# Altium PCB PCB2.PcbDoc
Units mil, origin at the board's own origin, x right, y up, seen from the top; angles counter-clockwise.
Board outline 7210 x 4950 mil, 2 copper layers (Top Layer, Bottom Layer); 18 components, 25 nets, 105 pads, 0 vias.
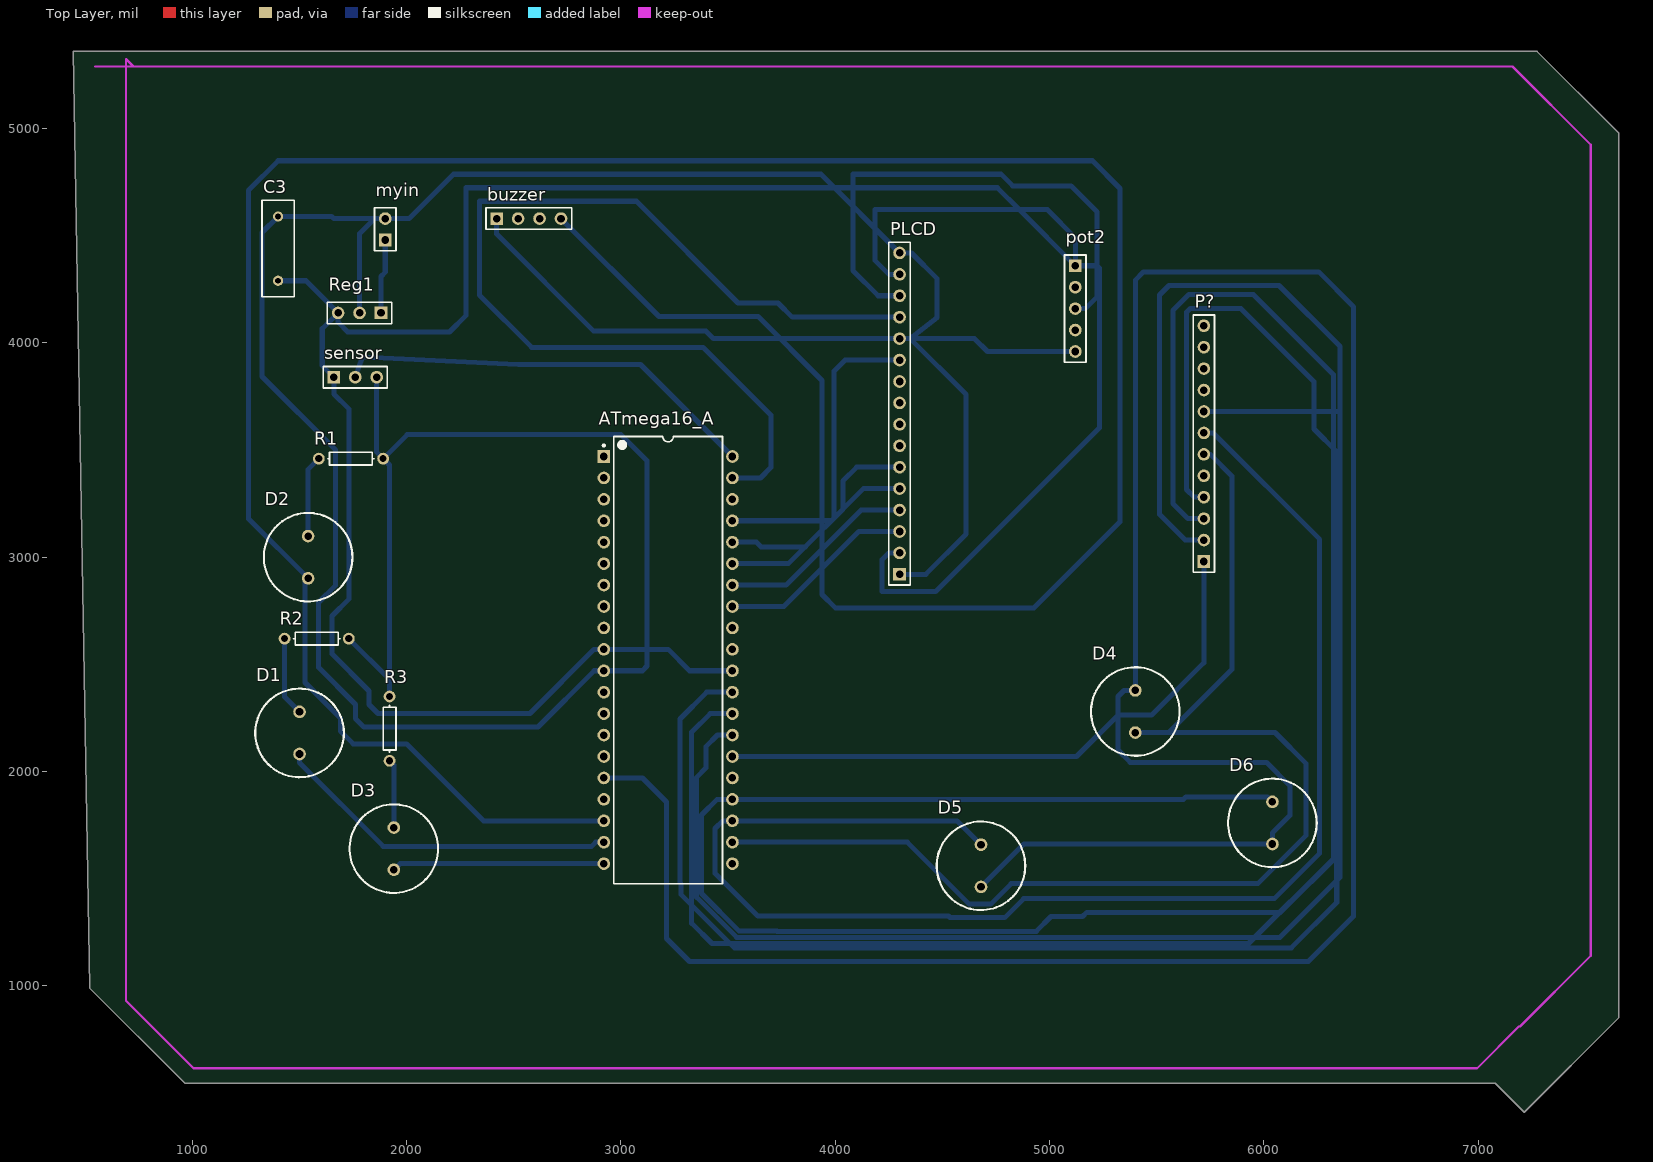
[diagram p0: Top Layer view]
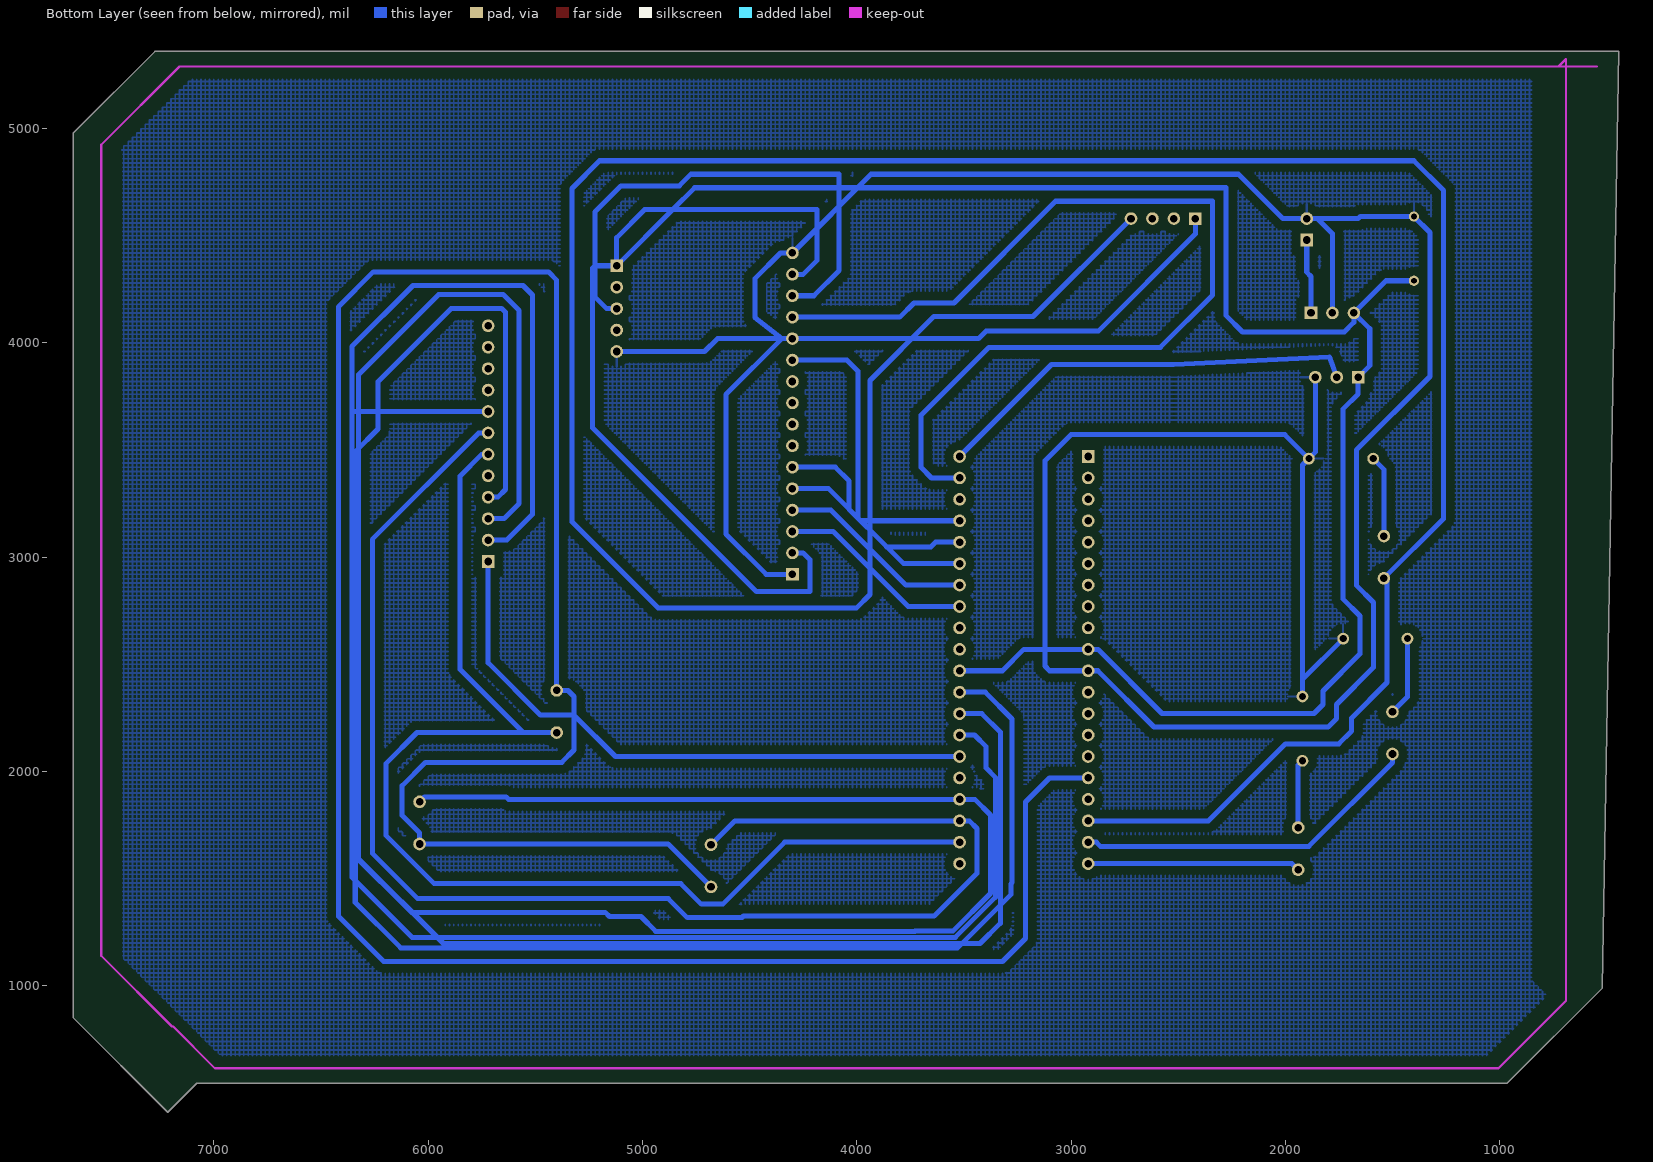
[diagram p1: Bottom Layer view, seen from below]

## Layer stack, top to bottom
Top Layer: signal copper 1.4
Dielectric: dielectric 12.6, FR-4, Dk 4.8
Bottom Layer: signal copper 1.4

## Board outline
445,5360 7275,5360 7650,4985 7655,4980 7655,855 7655,850 7215,410 7080,545 1110,545 965,545 520,990

## Design rules (kind name [scope] priority, off if disabled: settings)
Clearance [All] p1: gap=39.37
PolygonConnect [All] p1: connectstyle=Relief reliefconductorwidth=10 reliefentries=4 polygonreliefangle="90 Angle"
RoutingLayers [All] p1: top layer_v5=FALSE bottom layer_v5=TRUE
RoutingVias [All] p1: holewidth=28 width=50 viastyle="Through Hole" minholewidth=28 minwidth=50 maxholewidth=28 maxwidth=50
SilkscreenOverComponentPads [All] p1: minsilkscreentomaskgap=10
SolderMaskExpansion [All] p1: expansion=4
Width [All] p1: maxlimit=23.62 minlimit=23.62 preferedwidth=23.62 minimp=50.000000 maximp=50.000000 favimp=50.000000
26 further rules are at their usual default settings.

## Components (designator, comment, footprint, x,y, rotation, side; value= is the part's Value field where it differs from the comment)
ATmega16_A "ATmega16-16PC" 40P6 3220,2520 r0 top
buzzer "Header 4" HDR1X4 2420,4580 r0 top
C3 "Cap" RAD-0.3 1400,4440 r270 top
D1 "LED0" RB5-10.5 1500,2180 r90 top
D2 "LED0" RB5-10.5 1540,3000 r90 top
D3 "LED0" RB5-10.5 1940,1640 r90 top
D4 "LED0" RB5-10.5 5400,2280 r270 top
D5 "LED0" RB5-10.5 4680,1560 r90 top
D6 "LED0" RB5-10.5 6040,1760 r90 top
myin "Header 2" HDR1X2 1900,4480 r90 top
P? "Header 12" HDR1X12 5720,2980 r90 top
PLCD "Header 16" HDR1X16 4300,2920 r90 top
pot2 "Header 5" HDR1X5 5120,4360 r270 top
R1 "Res1" AXIAL-0.3 1740,3460 r180 top
R2 "Res1" AXIAL-0.3 1580,2620 r180 top
R3 "Res1" AXIAL-0.3 1920,2200 r270 top
Reg1 "MC7805ACT" HDR1X3 1880,4140 r180 top
sensor "Header 3" HDR1X3 1660,3840 r0 top

## Footprints (in the part's own frame and the unit in brackets; to place one, negate y for a bottom-side part, rotate by r counter-clockwise, add the part's x,y. Pads: shape width x height; smd on the part's side, far side on the other; paste and mask are expansions set on the pad)
40P6 [mm] "DIP, 40-Leads, Row Spacing 15.24mm, Pitch 2.54mm, Body 52.2x13.95mm"
  rect 1.5x1.5 hole 0.9: 1(-7.62,24.13)
  round 1.5 hole 0.9: 2(-7.62,21.59) 3(-7.62,19.05) 4(-7.62,16.51) 5(-7.62,13.97) 6(-7.62,11.43) 7(-7.62,8.89) 8(-7.62,6.35) 9(-7.62,3.81) 10(-7.62,1.27) 11(-7.62,-1.27) 12(-7.62,-3.81) 13(-7.62,-6.35) 14(-7.62,-8.89) 15(-7.62,-11.43) 16(-7.62,-13.97) 17(-7.62,-16.51) 18(-7.62,-19.05) 19(-7.62,-21.59) 20(-7.62,-24.13) 21(7.62,-24.13) 22(7.62,-21.59) 23(7.62,-19.05) 24(7.62,-16.51) 25(7.62,-13.97) 26(7.62,-11.43) 27(7.62,-8.89) 28(7.62,-6.35) 29(7.62,-3.81) 30(7.62,-1.27) 31(7.62,1.27) 32(7.62,3.81) 33(7.62,6.35) 34(7.62,8.89) 35(7.62,11.43) 36(7.62,13.97) 37(7.62,16.51) 38(7.62,19.05) 39(7.62,21.59) 40(7.62,24.13)
  silkscreen extent -7.74,-26.5 6.45,26.5, body extent -7.05,-26.47 7.05,26.47, height 4.83
AXIAL-0.3 [mm] "Axial Device, Thru-Hole; 2 Leads; 0.3 in Pin Spacing"
  round 1.4 hole 0.85: 1(-3.81,0) 2(3.81,0)
  silkscreen extent -2.77,-0.76 2.77,0.76
HDR1X2 [mm] "Connector; Header; 2 Position"
  rect 1.5x1.5 hole 0.9: 1(0,0)
  round 1.5 hole 0.9: 2(2.54,0)
  silkscreen extent -1.27,-1.27 3.81,1.27
HDR1X3 [mm] "Connector; Header; 3 Position"
  rect 1.5x1.5 hole 0.9: 1(0,0)
  round 1.5 hole 0.9: 2(2.54,0) 3(5.08,0)
  silkscreen extent -1.27,-1.27 6.35,1.27
HDR1X4 [mm] "Connector; Header; 4 Position"
  rect 1.5x1.5 hole 0.9: 1(0,0)
  round 1.5 hole 0.9: 2(2.54,0) 3(5.08,0) 4(7.62,0)
  silkscreen extent -1.27,-1.27 8.89,1.27
HDR1X5 [mm] "Connector; Header; 5 Position"
  rect 1.5x1.5 hole 0.9: 1(0,0)
  round 1.5 hole 0.9: 2(2.54,0) 3(5.08,0) 4(7.62,0) 5(10.16,0)
  silkscreen extent -1.27,-1.27 11.43,1.27
HDR1X12 [mm] "Connector; Header; 12 Position"
  rect 1.5x1.5 hole 0.9: 1(0,0)
  round 1.5 hole 0.9: 2(2.54,0) 3(5.08,0) 4(7.62,0) 5(10.16,0) 6(12.7,0) 7(15.24,0) 8(17.78,0) 9(20.32,0) 10(22.86,0) 11(25.4,0) 12(27.94,0)
  silkscreen extent -1.27,-1.27 29.21,1.27
HDR1X16 [mm] "Connector; Header; 16 Position"
  rect 1.5x1.5 hole 0.9: 1(0,0)
  round 1.5 hole 0.9: 2(2.54,0) 3(5.08,0) 4(7.62,0) 5(10.16,0) 6(12.7,0) 7(15.24,0) 8(17.78,0) 9(20.32,0) 10(22.86,0) 11(25.4,0) 12(27.94,0) 13(30.48,0) 14(33.02,0) 15(35.56,0) 16(38.1,0)
  silkscreen extent -1.27,-1.27 39.37,1.27
RAD-0.3 [mm] "Radial Cap, Thru-Hole; 2 Leads; 0.3 in Pin Spacing"
  round 1.2 hole 0.7: 1(-3.81,0) 2(3.81,0)
  silkscreen extent -5.71,-1.91 5.71,1.91
RB5-10.5 [mm] "Motor, General Kind; 2 Leads"
  round 1.5 hole 0.9: 1(-2.5,0) 2(2.5,0)
  silkscreen extent -5.25,-5.25 5.25,5.25

## Part data
ATmega16_A: "8-Bit AVR Microcontroller with 16K Bytes of In-System Programmable Flash Memory"
buzzer: "Header, 4-Pin"
C3: "Capacitor"
D1 D2 D3 D4 D5 D6: "Typical INFRARED GaAs LED"
myin: "Header, 2-Pin"
P?: "Header, 12-Pin"
PLCD: "Header, 16-Pin"
pot2: "Header, 5-Pin"
R1 R2 R3: "Resistor"
Reg1: "3-Terminal Positive Fixed Voltage Regulator"
sensor: "Header, 3-Pin"

## Nets (pads, with @x,y where several pads share a name; then routed paths per layer and width w, separated by ;. In a path a pad name is that pad's centre, name@x,y a point inside that pad or via, vN(x,y) a via of type N, cw(c..) or ccw(c..) an arc to the next point about the centre after c; other vN are vias at no path point)
C1: ATmega16_A.22 D4.2 P?.6 | length 5771.1
  Bottom Layer w23.62: ATmega16_A.22 4335.86,1670 4625,1380.86 4725,1380.86 4820.66,1476.53 5971.53,1476.53 6197.52,1702.52 6197.52,2036.11 6052.05,2181.57 5556.3,2181.57 ; P?.6 5750,3480 5851.72,3378.28 5851.72,2476.99 5556.3,2181.57 ; 5556.3,2181.57 D4.2 5556.3,2181.57
C2: ATmega16_A.23 D5.2 P?.7 | length 6754
  Bottom Layer w23.62: D5.2 4568.43,1770 ATmega16_A.23 3475,1770 3439,1734 3439,1525 3638.57,1325.43 4528.02,1325.43 4535.57,1317.87 4790.52,1317.87 4879.11,1406.47 6048.52,1406.47 6260.51,1618.45 6260.51,3083.21 5763.72,3580 P?.7
C3: ATmega16_A.24 D6.2 P?.8 | length 8972.9
  Bottom Layer w23.62: P?.8 6355,3680 6355,1619.86 6078.14,1343 5174,1343 5154,1323 5007,1323 4938,1254 3729,1254 3728,1255 3552,1255 3376,1431 3376,1797 3449,1870 ATmega16_A.24 5625.4,1870 5636.1,1880.7 6017.72,1880.7 D6.2
MG: ATmega16_A.11 buzzer.1 C3.1 myin.2 PLCD.1 PLCD.12 PLCD.16 pot2.5 R1.1 R2.1 R3.1 Reg1.2 sensor.3 | length 16900.5
  Bottom Layer w23.62: R2.1 1920,2430 ; Reg1.2 1780,4510 1850,4580 ; sensor.3 1860,3490 R1.1 ; buzzer.1 2420,4508 2873,4055 3397,4055 3432,4020 PLCD.12 4350,4020 ; PLCD.1 4422.52,2920 4610,3107.48 4610,3760 4350,4020 ; pot2.5 4710,3960 4650,4020 4350,4020 ; 1850,4580 myin.2 ; 1850,4580 1660,4580 1650,4590 C3.1 1325,4515 1325,3843.74 1668.74,3500 1668.74,2869.03 1588,2788.29 1588,2486.14 1761.42,2312.72 1761.42,2246.58 1800,2208 2613,2208 2875,2470 ATmega16_A.11 3100,2470 3121.82,2491.82 3121.82,3450.18 3000,3572 2002,3572 R1.1 ; 1850,4580 myin.2 ; R1.1 1920,3430 1920,2430 ; myin.2 2011,4580 2218,4787 3933,4787 PLCD.16 4355.2,4420 4475.51,4299.69 4475.51,4118.41 4350,4020 ; 1920,2430 R3.1 1920,2430
MP: ATmega16_A.10 ATmega16_A.30 C3.2 PLCD.2 PLCD.15 pot2.1 Reg1.3 sensor.1 | length 12451.4
  Bottom Layer w23.62: C3.2 1530,4290 Reg1.3 ; ATmega16_A.30 3320,2470 3220,2570 ATmega16_A.10 2874,2570 2575,2271 1866.58,2271 1824.42,2313.15 1824.42,2375.71 1651,2549.13 1651,2725.17 1731.73,2805.9 1731.73,3690.27 1660,3762 sensor.1 1606,3894 1606,4066 Reg1.3 ; PLCD.2 4250,3020 4219,2989 4219,2839 4468,2839 5232,3603 5232,4350 5222,4360 pot2.1 ; PLCD.15 4250,4320 4186,4384 4186,4622 4858,4622 ; Reg1.3 1680,4096 1725,4051 2200,4051 2276,4127 2276,4724 4756,4724 4858,4622 ; 4858,4622 pot2.1 ; 4858,4622 4989,4622 5120,4491 pot2.1
MYINT0: ATmega16_A.16 D4.1 D5.1 D6.1 | length 13136.6
  Bottom Layer w23.62: ATmega16_A.16 3100,1970 3212.01,1857.99 3212.01,1221.08 3319.7,1113.39 6207.38,1113.39 6418.49,1324.5 6418.49,4168.51 6255.54,4331.46 5438.79,4331.46 5400,4292.67 D4.1 5347.43,2378.43 5319,2350 5319,2100 5376,2043 6012.09,2043 6121,1934.09 6121,1795.02 6040,1714.02 D6.1 4880,1661.57 D5.1
NetATmega16_A_18: ATmega16_A.18 buzzer.4 D2.1 | length 13962.8
  Bottom Layer w23.62: buzzer.4 3177,4123 3640,4123 3938,3825 3938,2825.69 4000,2763.69 4927.69,2763.69 5329,3165 5329,4721 5200,4850 1400,4850 1262,4712 1262,3179.57 D2.1 1525,2886.57 1525,2415 1691,2249 1691,2188 1750,2129 1999,2129 2358,1770 ATmega16_A.18
NetATmega16_A_19: ATmega16_A.19 D1.1 | length 1630
  Bottom Layer w23.62: D1.1 1500,2041 1890,1651 2863,1651 2882,1670 ATmega16_A.19
NetATmega16_A_20: ATmega16_A.20 D3.1 | length 991.8
  Bottom Layer w23.62: D3.1 1968.43,1570 ATmega16_A.20
NetATmega16_A_40: ATmega16_A.40 sensor.2 | length 2004.4
  Bottom Layer w23.62: sensor.2 1794,3934 2520.72,3898.71 3091.29,3898.71 ATmega16_A.40
NetD1_2: D1.2 R2.2 | length 370.6
  Bottom Layer w23.62: R2.2 1430,2348.43 D1.2
NetD2_2: D2.2 R1.2 | length 382.3
  Bottom Layer w23.62: D2.2 1540,3410 R1.2
NetD3_2: D3.2 R3.2 | length 319.9
  Bottom Layer w23.62: R3.2 1940,2030 D3.2
Netmyin_1: myin.1 Reg1.1 | length 348.3
  Bottom Layer w23.62: Reg1.1 1880,4310 1900,4330 myin.1
P1: ATmega16_A.33 PLCD.3 | length 925
  Bottom Layer w23.62: ATmega16_A.33 3760,2770 4110,3120 PLCD.3
P2: ATmega16_A.34 PLCD.4 | length 925
  Bottom Layer w23.62: ATmega16_A.34 3770.91,2870 4120.91,3220 PLCD.4
P3: ATmega16_A.35 PLCD.5 | length 925
  Bottom Layer w23.62: ATmega16_A.35 3781,2970 4131,3320 PLCD.5
P4: ATmega16_A.36 PLCD.6 | length 1020
  Bottom Layer w23.62: ATmega16_A.36 3632,3070 3653.5,3048.5 3860.33,3048.5 4036.21,3224.38 4036.21,3356.21 4100,3420 PLCD.6
P5: ATmega16_A.37 PLCD.11 | length 1492.4
  Bottom Layer w23.62: ATmega16_A.37 3981.83,3170 3994,3182.17 3994,3868 4046,3920 PLCD.11
P6: ATmega16_A.39 PLCD.13 | length 4659.3
  Bottom Layer w23.62: ATmega16_A.39 3650.83,3370 3700,3419.17 3700,3662.36 3382.94,3979.42 2583.58,3979.42 2339,4224 2339,4661 3072.1,4661 3546.42,4186.68 3733,4186.68 3799.68,4120 PLCD.13
P7: PLCD.14 pot2.3 | length 2449.6
  Bottom Layer w23.62: PLCD.14 4200,4220 4082,4338 4082,4787 4774,4787 4828,4733 5100,4733 5222,4611 5222,4215 5167,4160 pot2.3
R1: ATmega16_A.26 P?.1 | length 2854
  Bottom Layer w23.62: ATmega16_A.26 5126,2070 5319,2263 5476,2263 5720,2507 P?.1
R2: ATmega16_A.27 P?.2 | length 8799.2
  Bottom Layer w23.62: ATmega16_A.27 3450,2170 3396,2116 3396,2016 3353,1973 3353,1413 3540,1226 6075,1226 6355,1506 6355,3984 6071,4268 5557,4268 5513,4224 5513,3200 5633,3080 P?.2
R3: ATmega16_A.28 P?.3 | length 8583.2
  Bottom Layer w23.62: ATmega16_A.28 3416,2270 3330,2184 3330,1292 3425,1197 5928.14,1197 6324,1592.86 6324,3853 5951,4226 5650,4226 5576,4152 5576,3250 5646,3180 P?.3
R4: ATmega16_A.29 P?.4 | length 8509.7
  Bottom Layer w23.62: ATmega16_A.29 3400,2370 3275,2245 3275,1481 3281,1475 3281,1425 3529,1177 6128,1177 6340,1389 6340,3492 6234,3598 6234,3819 5892,4161 5657,4161 5639,4143 5639,3316 5675,3280 P?.4
pads on no net: ATmega16_A.1 ATmega16_A.2 ATmega16_A.3 ATmega16_A.4 ATmega16_A.5 ATmega16_A.6 ATmega16_A.7 ATmega16_A.8 ATmega16_A.9 ATmega16_A.12 ATmega16_A.13 ATmega16_A.14 ATmega16_A.15 ATmega16_A.17 ATmega16_A.21 ATmega16_A.25 ATmega16_A.31 ATmega16_A.32 ATmega16_A.38 buzzer.2 buzzer.3 P?.5 P?.9 P?.10 P?.11 P?.12 PLCD.7 PLCD.8 PLCD.9 PLCD.10 pot2.2 pot2.4

## Polygon pours and split planes (outlines as drawn)
MG on Bottom Layer "Keep-Out Layer-No Net" (hatched 90Degree grid 20 track 8): 795,5230 7065,5230 7110,5230 7435,4905 7425,4895 7425,1250 7425,1130 6995,700 6970,675 1105,675 1060,675 780,955 850,1025 850,5230

## Keep-outs
Keep-Out Layer:
  lines w10: 545,5290 7160,5290 7525,4925 7525,1140 7195,810 7190,810 6995,615 1005,615 690,930 690,5325 725,5290